# EAGLE board axiom_beta_plugin_module_TE0714_SDI_v0.10-Beta.8634a5f2 (EAGLE 7.7.0), part 1 of 2
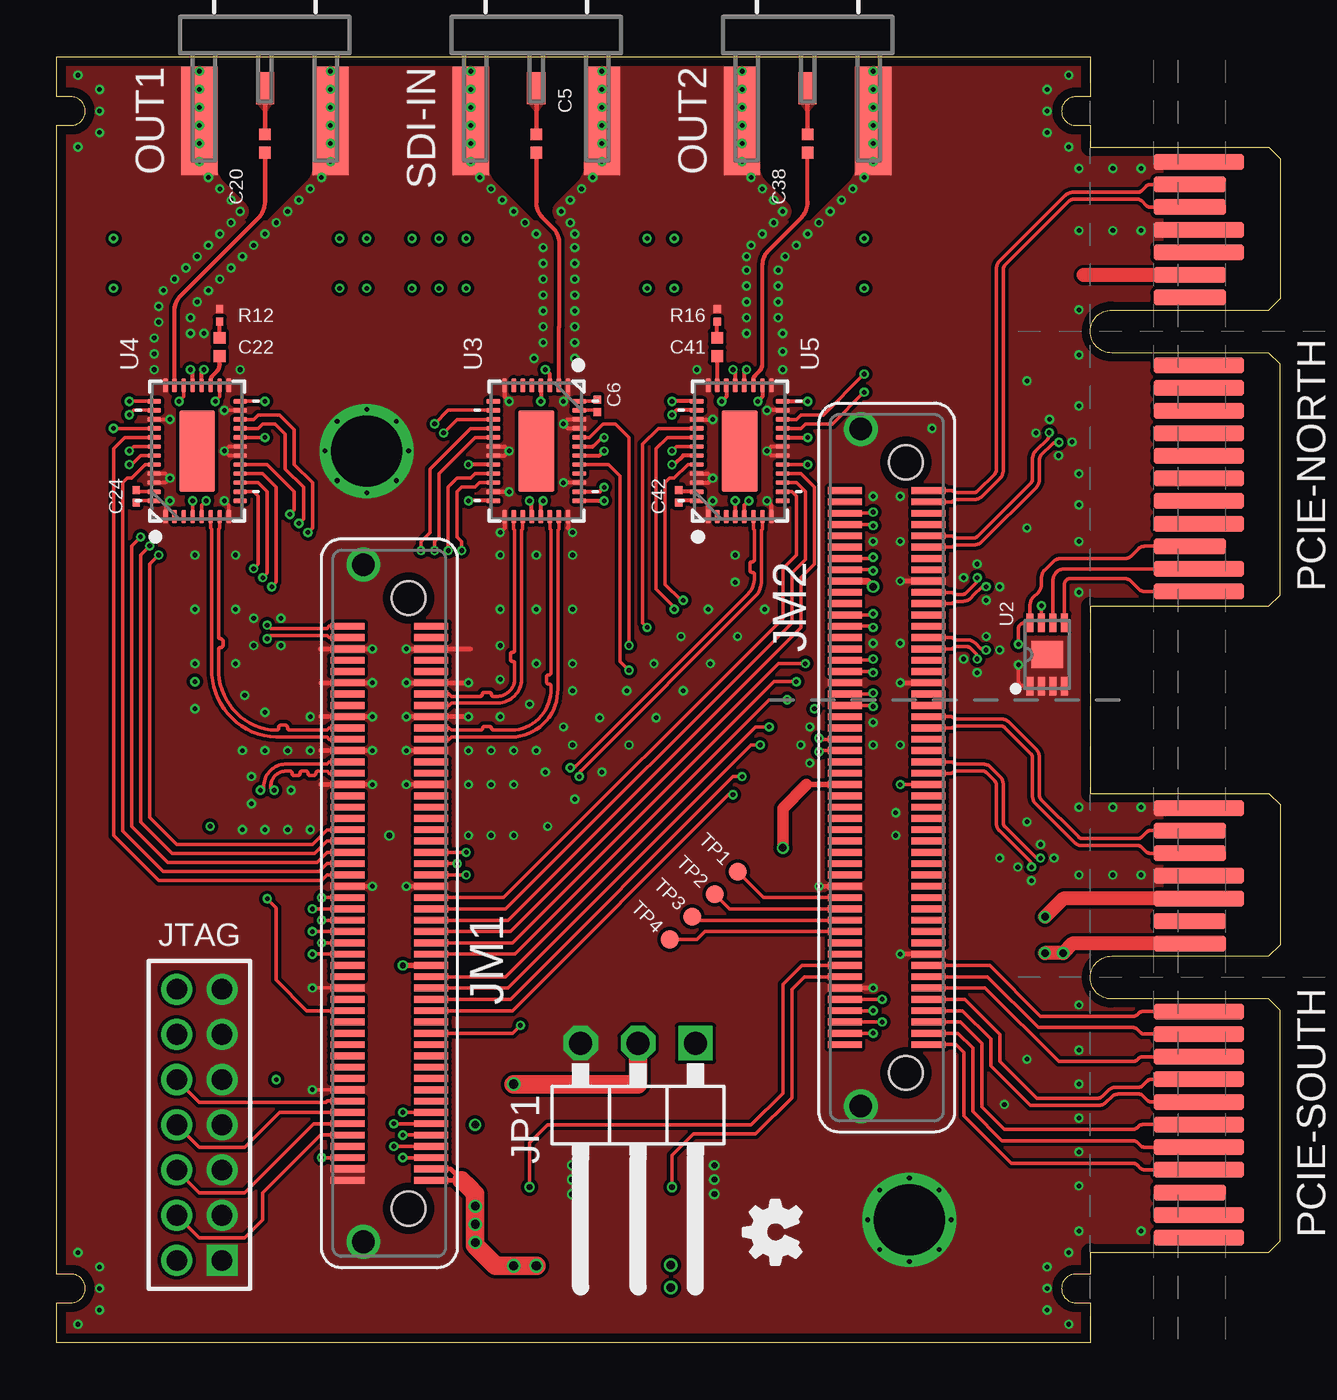
[diagram p0: board, top side]
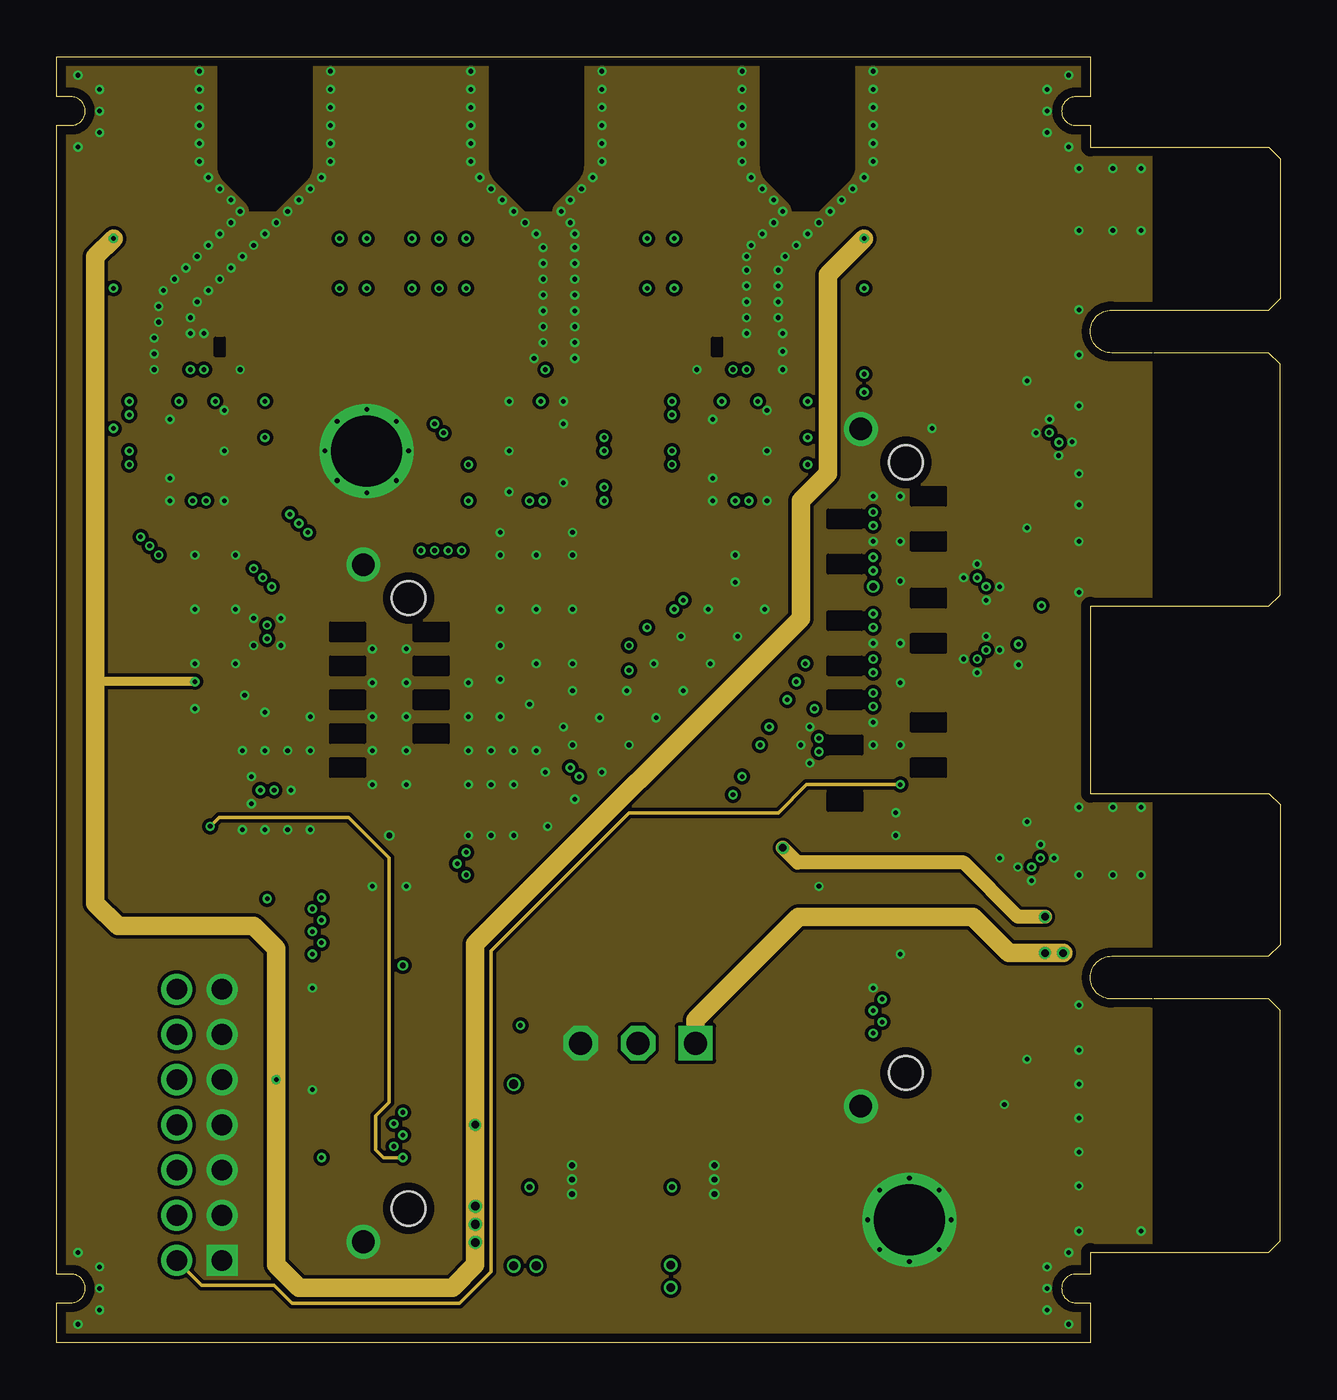
[diagram p1: board, inner layer Route2]
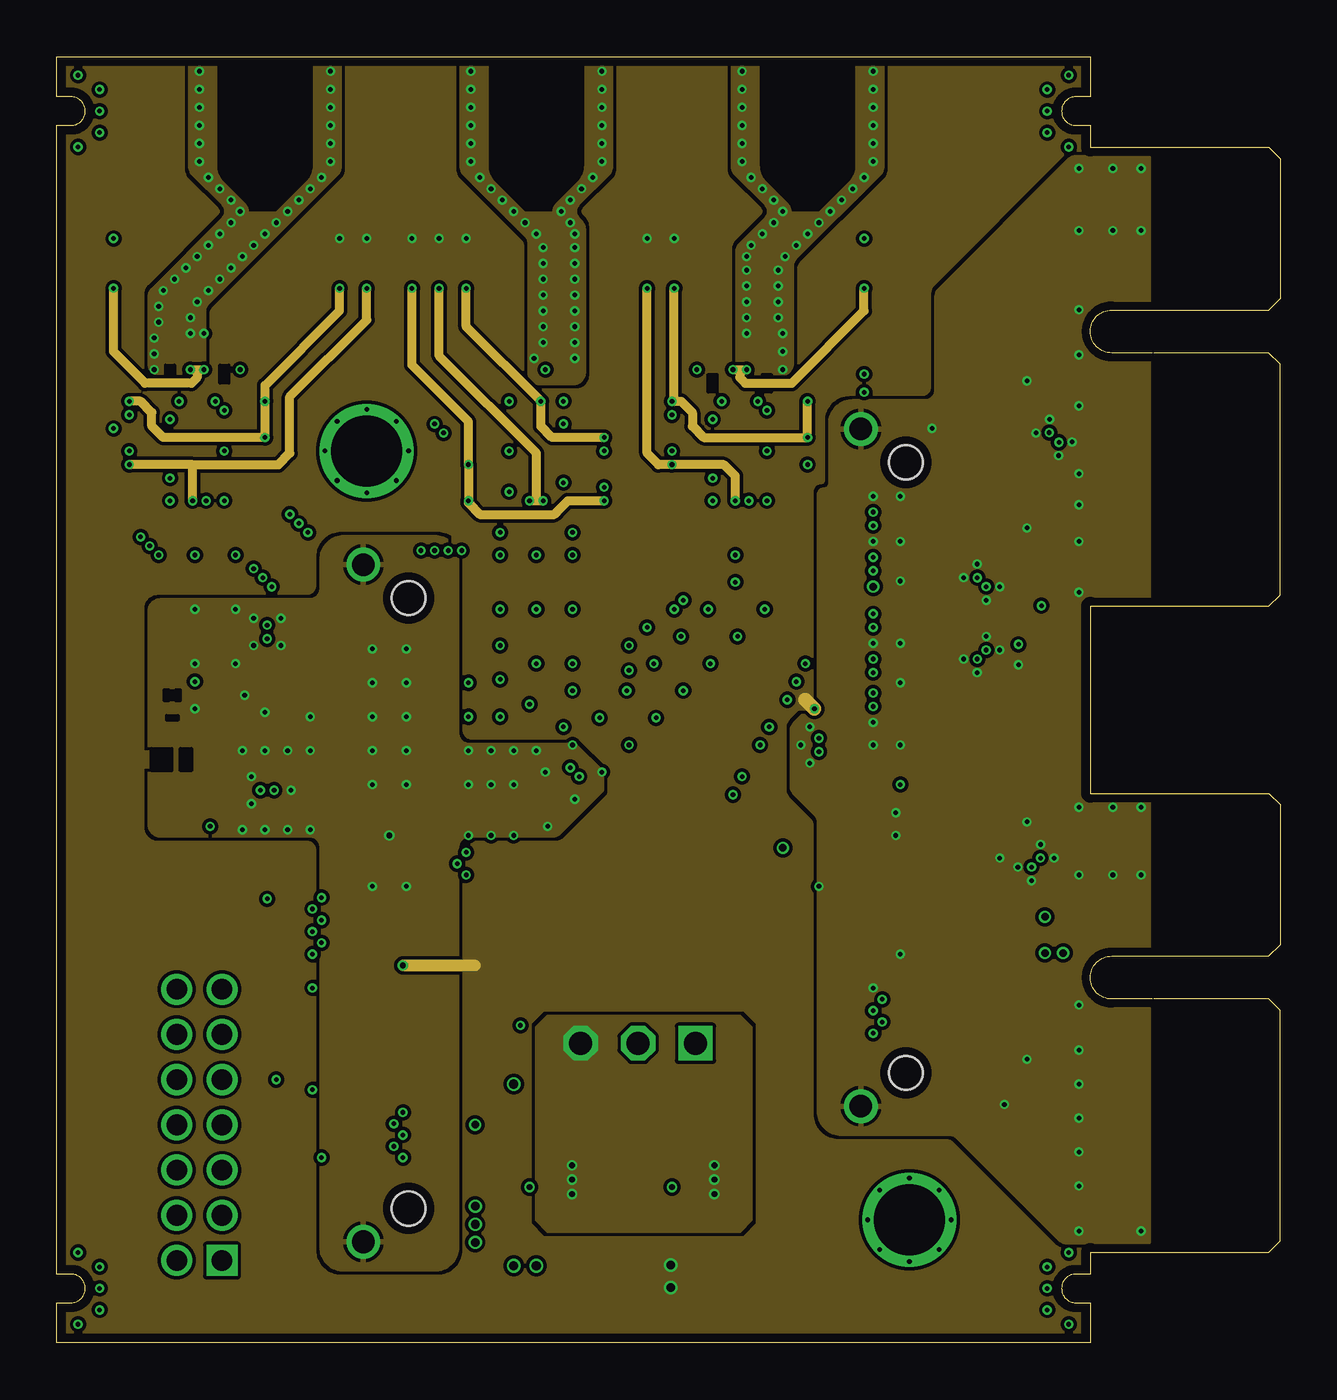
[diagram p2: board, inner layer Route15]
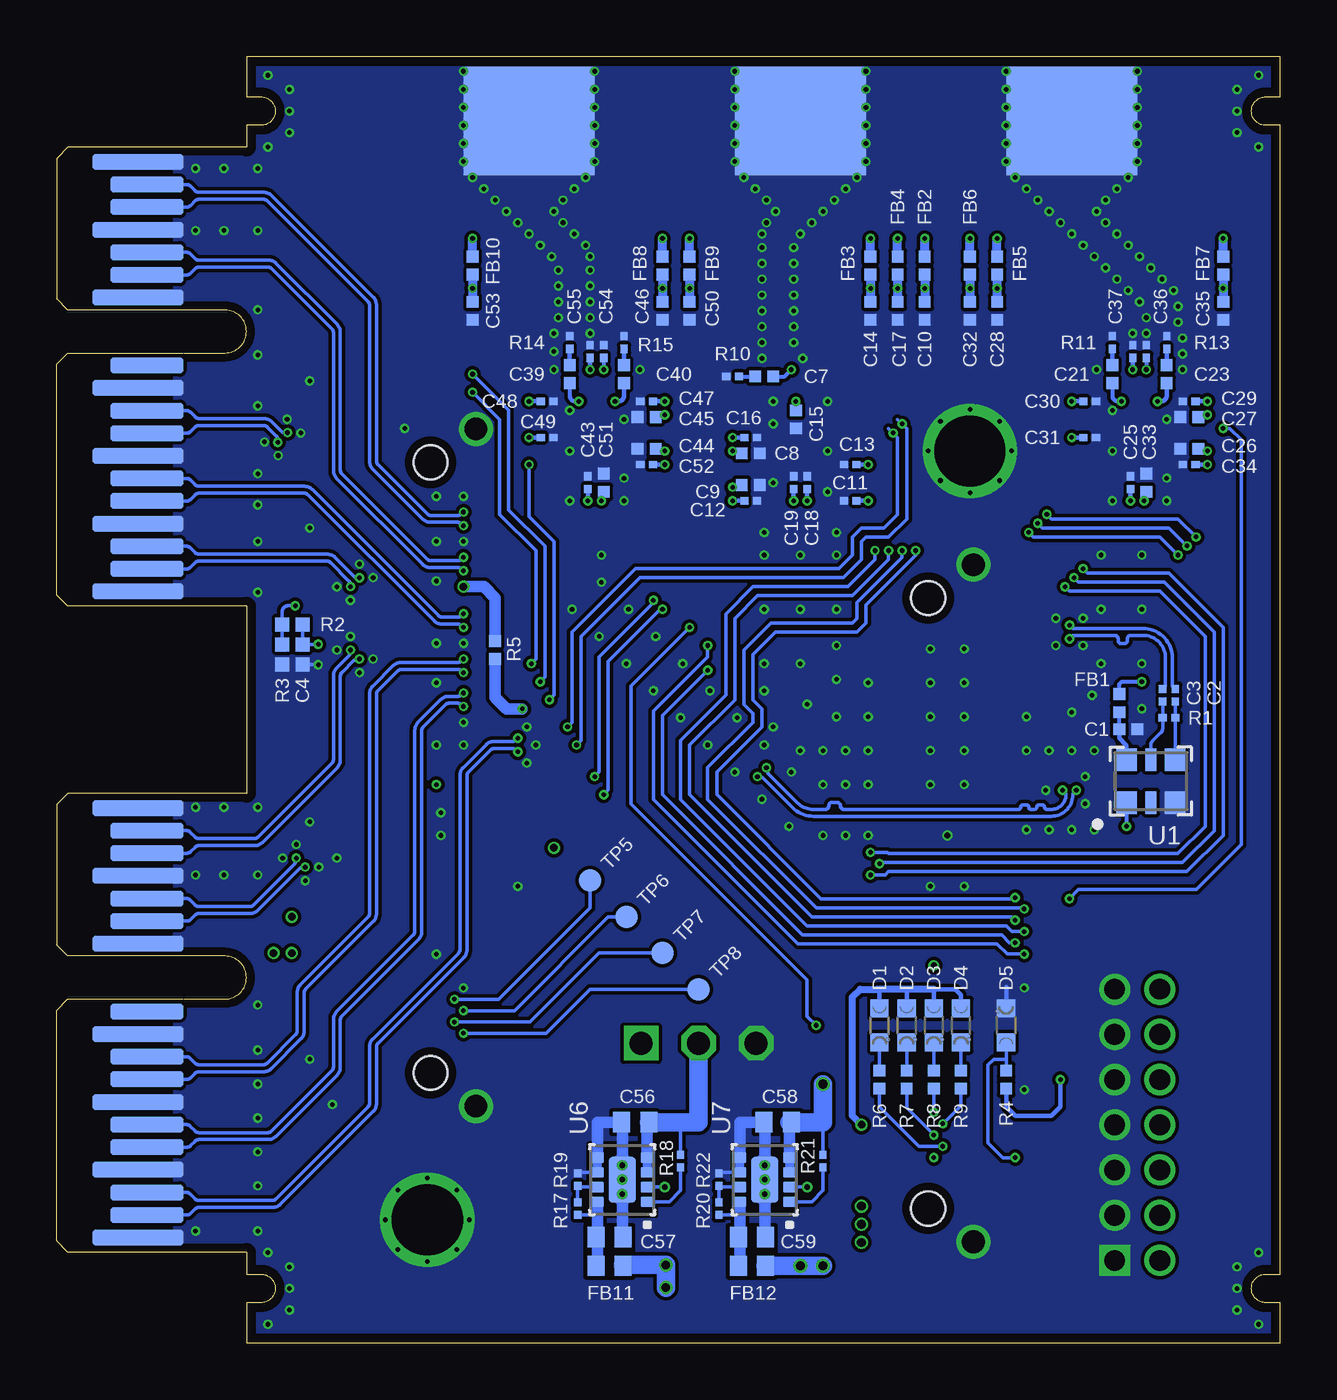
[diagram p3: board, bottom side, seen from below]

Size 54.12 x 56.9 mm. Coordinates in mm from the lower left corner, seen from the top.
Outline: 45.72,32.59 45.72,24.31
Outline: 45.72,52.89 45.72,53.85 45.09,53.85 arc-90 44.45,54.48 arc-90 45.09,55.12 45.72,55.12 45.72,56.9 0,56.9 0,55.12 0.63,55.12 arc-90 1.27,54.48 arc-90 0.63,53.85 0,53.85 0,3.05 0.63,3.05 arc-90 1.27,2.41 arc-90 0.63,1.78 0,1.78 0,0 45.72,0 45.72,1.78 45.09,1.78 arc-90 44.45,2.41 arc-90 45.09,3.05 45.72,3.05 45.72,4.01
Copper layers (1*2*15*16): Top 0.035559375mm / dielectric 0.17018125mm / Route2 0.01778125mm / dielectric 47mil / Route15 0.01778125mm / dielectric 0.17018125mm / Bottom 0.035559375mm
Design rules "OSHPark-4layer-tuned *": minimum track width 5mil, minimum drill 8mil, track to track 5mil, track to pad 5mil, pad to pad 5mil, via to via 5mil, smd to smd 5mil, copper to edge 15mil, drill to drill 6mil, minimum pad ring 4mil, minimum via ring 4mil, stop-mask expansion 2mil, vias tented up to drill 25mil, thermal gap 6mil
Net classes: 0 default: width 0.152 mm, drill 0.203 mm, clearance 0.152 mm; 1 LVDS: width 0.152 mm, drill 0.203 mm, clearance 0.152 mm; 2 75Ohm: width 0.178 mm, drill 0.203 mm, clearance 0.254 mm; 3 MGT: width 0.152 mm, drill 0.203 mm, clearance 0.356 mm
tKeepout: area 43.5,52.9 to 46.7,56.1; area 43.5,0.8 to 46.7,4; area -1,52.9 to 2.2,56.1; area -1,0.8 to 2.2,4
bKeepout: area 43.5,52.9 to 46.7,56.1; area 43.5,0.8 to 46.7,4; area -1,52.9 to 2.2,56.1; area -1,0.8 to 2.2,4

## Footprints (pad centres in the part's own frame; a part is rotated, then mirrored left to right if it is on the bottom)
0402-C = smd 0.52 x 0.52: 1 -0.4,0; 2 0.4,0
0201-C = smd 0.36 x 0.32: 1 -0.28,0; 2 0.28,0
0402-B = smd 0.62 x 0.62: 1 -0.45,0; 2 0.45,0
0603-C = smd 0.75 x 0.9: 1 -0.6,0; 2 0.6,0
CHIPLED_0603 = smd 0.8 x 0.8: A 0,-0.75; C 0,0.75
LSHM-150-XX.X-XX-DV-A-S = smd 0.3 x 1.5: 1 12.25,-1.85; 2 12.25,1.85; 3 11.75,-1.85; 4 11.75,1.85; 5 11.25,-1.85; 6 11.25,1.85; 7 10.75,-1.85; 8 10.75,1.85; 9 10.25,-1.85; 10 10.25,1.85; 11 9.75,-1.85; 12 9.75,1.85; 13 9.25,-1.85; 14 9.25,1.85; 15 8.75,-1.85; 16 8.75,1.85; 17 8.25,-1.85; 18 8.25,1.85; 19 7.75,-1.85; 20 7.75,1.85; 21 7.25,-1.85; 22 7.25,1.85; 23 6.75,-1.85; 24 6.75,1.85; 25 6.25,-1.85; 26 6.25,1.85; 27 5.75,-1.85; 28 5.75,1.85; 29 5.25,-1.85; 30 5.25,1.85; 31 4.75,-1.85; 32 4.75,1.85; 33 4.25,-1.85; 34 4.25,1.85; 35 3.75,-1.85; 36 3.75,1.85; 37 3.25,-1.85; 38 3.25,1.85; 39 2.75,-1.85; 40 2.75,1.85; 41 2.25,-1.85; 42 2.25,1.85; 43 1.75,-1.85; 44 1.75,1.85; 45 1.25,-1.85; 46 1.25,1.85; 47 0.75,-1.85; 48 0.75,1.85; 49 0.25,-1.85; 50 0.25,1.85; 51 -0.25,-1.85; 52 -0.25,1.85; 53 -0.75,-1.85; 54 -0.75,1.85; 55 -1.25,-1.85; 56 -1.25,1.85; 57 -1.75,-1.85; 58 -1.75,1.85; 59 -2.25,-1.85; 60 -2.25,1.85; 61 -2.75,-1.85; 62 -2.75,1.85; 63 -3.25,-1.85; 64 -3.25,1.85; 65 -3.75,-1.85; 66 -3.75,1.85; 67 -4.25,-1.85; 68 -4.25,1.85; 69 -4.75,-1.85; 70 -4.75,1.85; 71 -5.25,-1.85; 72 -5.25,1.85; 73 -5.75,-1.85; 74 -5.75,1.85; 75 -6.25,-1.85; 76 -6.25,1.85; 77 -6.75,-1.85; 78 -6.75,1.85; 79 -7.25,-1.85; 80 -7.25,1.85; 81 -7.75,-1.85; 82 -7.75,1.85; 83 -8.25,-1.85; 84 -8.25,1.85; 85 -8.75,-1.85; 86 -8.75,1.85; 87 -9.25,-1.85; 88 -9.25,1.85; 89 -9.75,-1.85; 90 -9.75,1.85; 91 -10.25,-1.85; 92 -10.25,1.85; 93 -10.75,-1.85; 94 -10.75,1.85; 95 -11.25,-1.85; 96 -11.25,1.85; 97 -11.75,-1.85; 98 -11.75,1.85; 99 -12.25,-1.85; 100 -12.25,1.85 | drill 1 pad 1.5: F1 14.975,1.15; F2 -14.975,1.15 | hole 1.5: -13.5,-0.85; 13.5,-0.85
1X03/90-S = drill 1.016 square: 1 -2.54,-3.81 | drill 1.016 octagon: 2 0,-3.81; 3 2.54,-3.81
2X07M = drill 0.914 square: 1 -6,-1 | drill 0.914: 2 -6,1; 3 -4,-1; 4 -4,1; 5 -2,-1; 6 -2,1; 7 0,-1; 8 0,1; 9 2,-1; 10 2,1; 11 4,-1; 12 4,1; 13 6,-1; 14 6,1
HDBNC_EDGE_2SIDE = smd 1.4 x 0.8: 1 -1.55,0 | smd 4.8 x 1.6: 2@1 -3,-2.9; 2@2 -3,2.9 | smd 4.8 x 5.8 bottom: 2@3 -3,0
PCIE-36-AXIOM = smd 0.7 x 4 bottom: A1 -11.5,3.6; A4 -8.5,3.6; A7 -5.5,3.6; A10 -2.5,3.6; A12 1.5,3.6; A15 4.5,3.6; A18 7.5,3.6 | smd 0.7 x 3.2 bottom: A2 -10.5,4; A3 -9.5,4; A5 -7.5,4; A6 -6.5,4; A8 -4.5,4; A9 -3.5,4; A11 -1.5,4; A13 2.5,4; A14 3.5,4; A16 5.5,4; A17 6.5,4 | smd 0.7 x 4: B1 -11.5,3.6; B2 -10.5,3.6; B4 -8.5,3.6; B5 -7.5,3.6; B6 -6.5,3.6; B7 -5.5,3.6; B8 -4.5,3.6; B9 -3.5,3.6; B10 -2.5,3.6; B11 -1.5,3.6; B14 3.5,3.6; B15 4.5,3.6; B18 7.5,3.6 | smd 0.7 x 3.2: B3 -9.5,4; B12 1.5,4; B13 2.5,4; B16 5.5,4; B17 6.5,4
TP08R = smd 0.8 x 0.8: TP 0,0
TP10R = smd 1 x 1: TP 0,0
3.2X2.5 = smd 0.9 x 1: 1 -1.075,-0.95; 3 1.075,-0.95; 4 1.075,0.95; 6 -1.075,0.95 | smd 0.5 x 1: 2 0,-0.95; 5 0,0.95
DFN200X300X100-9N = smd 0.813 x 0.305: 1 -1.397,0.762; 2 -1.397,0.254; 3 -1.397,-0.254; 4 -1.397,-0.762; 5 1.397,-0.762; 6 1.397,-0.254; 7 1.397,0.254; 8 1.397,0.762 | smd 1.194 x 1.397: EP 0,0
UQFN40P600X400X100-41N = smd 0.6 x 0.2: 1 -2.9,1.4; 2 -2.9,1; 3 -2.9,0.6; 4 -2.9,0.2; 5 -2.9,-0.2; 6 -2.9,-0.6; 7 -2.9,-1; 8 -2.9,-1.4; 21 2.9,-1.4; 22 2.9,-1; 23 2.9,-0.6; 24 2.9,-0.2; 25 2.9,0.2; 26 2.9,0.6; 27 2.9,1; 28 2.9,1.4 | smd 0.2 x 0.6: 9 -2.2,-1.9; 10 -1.8,-1.9; 11 -1.4,-1.9; 12 -1,-1.9; 13 -0.6,-1.9; 14 -0.2,-1.9; 15 0.2,-1.9; 16 0.6,-1.9; 17 1,-1.9; 18 1.4,-1.9; 19 1.8,-1.9; 20 2.2,-1.9; 29 2.2,1.9; 30 1.8,1.9; 31 1.4,1.9; 32 1,1.9; 33 0.6,1.9; 34 0.2,1.9; 35 -0.2,1.9; 36 -0.6,1.9; 37 -1,1.9; 38 -1.4,1.9; 39 -1.8,1.9; 40 -2.2,1.9 | smd 3.6 x 1.58: EP 0,0
MICROSIP = smd 0.48 x 0.58: 1 -0.975,-1.1; 2 -0.325,-1.1; 3 0.325,-1.1; 4 0.975,-1.1; 5 0.975,1.1; 6 0.325,1.1; 7 -0.325,1.1; 8 -0.975,1.1 | smd 2 x 1.2: EP 0,0

## Placement (x,y rotation side)
C1  470n  [0402-C]  6.72,27.15 0 bottom
C2  100n  [0201-C]  4.64,28.65 90 bottom
C3  100n  [0201-C]  5.2,28.65 90 bottom
C4  [0402-B]  43.24,30.45 270 bottom
C5  4u7  [0402-C]  21.22,53.05 270 top
C6  470n  [0201-C]  23.92,41.45 90 top
C7  4u7  [0402-C]  22.82,42.75 180 bottom
C8  10u  [0402-C]  23.42,39.35 0 bottom
C9  10u  [0402-C]  23.42,37.95 0 bottom
C10  10u  [0402-C]  15.72,45.65 270 bottom
C11  100n  [0201-C]  19.02,37.25 180 bottom
C12  100n  [0201-C]  23.42,37.25 0 bottom
C13  100n  [0201-C]  19.02,38.85 180 bottom
C14  10u  [0402-C]  18.12,45.65 270 bottom
C15  10u  [0402-C]  21.42,40.85 270 bottom
C16  1u  [0201-C]  23.42,40.05 0 bottom
C17  10u  [0402-C]  16.92,45.65 270 bottom
C18  100n  [0201-C]  20.92,38.05 90 bottom
C19  100n  [0201-C]  21.52,38.05 90 bottom
C20  4u7  [0402-C]  9.22,53.05 90 top
C21  4u7  [0402-C]  7.42,42.85 90 bottom
C22  4u7  [0402-C]  7.22,44.05 90 top
C23  4u7  [0402-C]  5.02,42.85 90 bottom
C24  470n  [0201-C]  3.52,37.45 270 top
C25  100n  [0201-C]  6.62,38.05 90 bottom
C26  10u  [0402-C]  4.02,39.55 180 bottom
C27  10u  [0402-C]  4.02,40.95 180 bottom
C28  10u  [0402-C]  12.52,45.65 270 bottom
C29  100n  [0201-C]  4.02,41.65 180 bottom
C30  100n  [0201-C]  8.42,41.65 0 bottom
C31  100n  [0201-C]  8.42,40.05 0 bottom
C32  10u  [0402-C]  13.72,45.65 270 bottom
C33  10u  [0402-C]  5.92,38.05 90 bottom
C34  1u  [0201-C]  4.02,38.85 180 bottom
C35  10u  [0402-C]  2.52,45.65 270 bottom
C36  100n  [0201-C]  5.92,43.85 90 bottom
C37  100n  [0201-C]  6.52,43.85 90 bottom
C38  4u7  [0402-C]  33.22,53.05 90 top
C39  4u7  [0402-C]  31.42,42.85 90 bottom
C40  4u7  [0402-C]  29.02,42.85 90 bottom
C41  4u7  [0402-C]  29.22,44.05 90 top
C42  470n  [0201-C]  27.52,37.45 270 top
C43  100n  [0201-C]  30.62,38.05 90 bottom
C44  10u  [0402-C]  28.02,39.55 180 bottom
C45  10u  [0402-C]  28.02,40.95 180 bottom
C46  10u  [0402-C]  27.32,45.65 270 bottom
C47  100n  [0201-C]  28.02,41.65 180 bottom
C48  100n  [0201-C]  32.42,41.65 0 bottom
C49  100n  [0201-C]  32.42,40.05 0 bottom
C50  10u  [0402-C]  26.12,45.65 270 bottom
C51  10u  [0402-C]  29.92,38.05 90 bottom
C52  1u  [0201-C]  28.02,38.85 180 bottom
C53  10u  [0402-C]  35.72,45.65 270 bottom
C54  100n  [0201-C]  29.92,43.85 90 bottom
C55  100n  [0201-C]  30.52,43.85 90 bottom
C56  [0603-C]  28.52,9.76 180 bottom
C57  [0603-C]  29.67,4.68 0 bottom
C58  [0603-C]  22.22,9.76 180 bottom
C59  [0603-C]  23.37,4.68 0 bottom
D1  LED  [CHIPLED_0603]  17.72,14.05 180 bottom
D2  LED  [CHIPLED_0603]  16.52,14.05 180 bottom
D3  LED  [CHIPLED_0603]  15.32,14.05 180 bottom
D4  LED  [CHIPLED_0603]  14.12,14.05 180 bottom
D5  LED  [CHIPLED_0603]  12.12,14.05 0 bottom
FB1  [0402-C]  7.12,28.3 270 bottom
FB2  [0402-C]  15.72,47.65 270 bottom
FB3  [0402-C]  18.12,47.65 270 bottom
FB4  [0402-C]  16.92,47.65 270 bottom
FB5  [0402-C]  12.52,47.65 270 bottom
FB6  [0402-C]  13.72,47.65 270 bottom
FB7  [0402-C]  2.52,47.65 270 bottom
FB8  [0402-C]  27.32,47.65 270 bottom
FB9  [0402-C]  26.12,47.65 270 bottom
FB10  [0402-C]  35.72,47.65 270 bottom
FB11  [0603-C]  29.67,3.41 0 bottom
FB12  [0603-C]  23.37,3.41 0 bottom
JM1  LSHM-150-XX.X-XX-DV-A-S  [LSHM-150-XX.X-XX-DV-A-S]  14.72,19.45 90 top
JM2  LSHM-150-XX.X-XX-DV-A-S  [LSHM-150-XX.X-XX-DV-A-S]  36.72,25.45 90 top
JP1  [1X03/90-S]  25.72,9.45 180 top
JTAG  [2X07M]  6.32,9.65 90 top
LOGO2  OSHW_LOGO_FILLX0100-NT  [OSHW_FILLX100_NOTEXT]  32.92,3.49 90 top
OUT1  HDBNC  [HDBNC_EDGE_2SIDE]  9.22,57.05 90 top
OUT2  HDBNC  [HDBNC_EDGE_2SIDE]  33.22,57.05 90 top
PCIE-NORTH  PCIE-36-AXIOM  [PCIE-36-AXIOM]  54.12,44.74 90 top  (not fitted)
PCIE-SOUTH  PCIE-36-AXIOM  [PCIE-36-AXIOM]  54.12,16.16 90 top  (not fitted)
R1  100R  [0201-C]  4.92,27.65 180 bottom
R2  10k  [0402-B]  43.69,31.78 180 bottom
R3  1k  [0402-B]  44.13,30.45 270 bottom
R4  10k  [0402-C]  12.12,11.65 270 bottom
R5  DNP  [0402-C]  34.72,30.65 90 bottom
R6  10k  [0402-C]  17.72,11.65 90 bottom
R7  10k  [0402-C]  16.52,11.65 90 bottom
R8  10k  [0402-C]  15.32,11.65 90 bottom
R9  10k  [0402-C]  14.12,11.65 90 bottom
R10  [0201-C]  24.22,42.75 180 bottom
R11  75R  [0201-C]  7.42,44.25 90 bottom
R12  75R  [0201-C]  7.22,45.45 90 top
R13  75R  [0201-C]  5.02,44.25 90 bottom
R14  75R  [0201-C]  31.42,44.25 90 bottom
R15  75R  [0201-C]  29.02,44.25 90 bottom
R16  75R  [0201-C]  29.22,45.45 90 top
R17  [0201-C]  31.07,5.95 270 bottom
R18  10k  [0201-C]  26.52,8.05 90 bottom
R19  [0201-C]  31.07,7.22 270 bottom
R20  [0201-C]  24.82,5.95 270 bottom
R21  10k  [0201-C]  20.22,8.05 90 bottom
R22  [0201-C]  24.82,7.22 270 bottom
SDI-IN  HDBNC  [HDBNC_EDGE_2SIDE]  21.22,57.05 90 top
TP1  TPTP08R  [TP08R]  30.12,20.85 0 top
TP2  TPTP08R  [TP08R]  29.12,19.85 0 top
TP3  TPTP08R  [TP08R]  28.12,18.85 0 top
TP4  TPTP08R  [TP08R]  27.12,17.85 0 top
TP5  TPTP10R  [TP10R]  30.52,20.45 0 bottom
TP6  TPTP10R  [TP10R]  28.92,18.85 0 bottom
TP7  TPTP10R  [TP10R]  27.32,17.25 0 bottom
TP8  TPTP10R  [TP10R]  25.72,15.65 0 bottom
U1  DSC11XX-3.2X2.5  [3.2X2.5]  5.72,24.85 0 bottom
U2  BR24G04NUX  [DFN200X300X100-9N]  43.81,30.45 90 top
U3  GS12241  [UQFN40P600X400X100-41N]  21.22,39.45 270 top
U4  GS12281  [UQFN40P600X400X100-41N]  6.22,39.45 90 top
U5  GS12281  [UQFN40P600X400X100-41N]  30.22,39.45 90 top
U6  TPS82085  [MICROSIP]  29.1,7.22 90 bottom
U7  TPS82085  [MICROSIP]  22.8,7.22 90 bottom

## Library data of the parts
C1-C59 FB1-FB12 R1-R22 = generic-rcl
D1-D5 = led
JM1 JM2 = LSHM-150-XX.X-XX-DV-A-S
JP1 JTAG = pinhead-2
LOGO2 = ohw-logo
OUT1 OUT2 SDI-IN = hdbnc
PCIE-NORTH PCIE-SOUTH = PCIe
TP1-TP8 = testpad
U1 = dsc11xx
U2 = eeprom
U3-U5 = gs122xx
U6 U7 = TPS82085

## Nets
1V8 [LVDS]: FB2.1 FB3.1 FB4.1 FB5.1 FB6.1 FB8.1 FB9.1 FB11.2 JM1.61 R5.1
3V3 [LVDS]: D1.A D2.A D3.A D4.A FB1.1 FB7.1 FB10.1 FB12.2 JM1.97 JM1.99 R4.2
ADC_N: JM1.27
ADC_P: JM1.25
B14_L0: JM2.99 PCIE-SOUTH.B4
B14_L4_N: JM2.57
B14_L4_P: JM2.55
B14_L5_N: JM2.58
B14_L5_P: JM2.56
B14_L7_N: JM2.59
B14_L7_P: JM2.61
B14_L8_N: JM2.62
B14_L8_P: JM2.60
B14_L9_N: JM2.66
B14_L9_P: JM2.64
B14_L10_N: JM2.77
B14_L10_P: JM2.75
B14_L11_N: JM2.74 TP1.TP
B14_L11_P: JM2.76 TP2.TP
B14_L12_N: JM2.84
B14_L12_P: JM2.82
B14_L13_N: JM2.86 U7.2
B14_L13_P: JM2.88 U6.2
B14_L14_N: JM2.78 TP3.TP
B14_L14_P: JM2.80 TP4.TP
B14_L15_N: JM2.65
B14_L15_P: JM2.63
B14_L16_N: JM2.81
B14_L16_P: JM2.79
B14_L17_N: JM2.89 PCIE-SOUTH.B9
B14_L17_P: JM2.91 PCIE-SOUTH.B8
B14_L18_N: JM2.85 PCIE-SOUTH.B11
B14_L18_P: JM2.87 PCIE-SOUTH.B10
B14_L19_N: JM2.94 TP6.TP
B14_L19_P: JM2.92 TP5.TP
B14_L20_N: JM2.95 PCIE-SOUTH.B6
B14_L20_P: JM2.93 PCIE-SOUTH.B7
B14_L21_N: JM1.95 U1.1
B14_L21_P: JM1.93 R6.1
B14_L22_N: JM2.96 TP7.TP
B14_L22_P: JM2.98 TP8.TP
B14_L23_N: JM1.89 R9.1
B14_L23_P: JM1.91 R7.1
B14_L24_N: JM1.85
B14_L24_P: JM1.87 R8.1
B14_L25: JM2.97 PCIE-SOUTH.B5
B15_L1_N [LVDS]: JM2.14 PCIE-NORTH.A14
B15_L1_P [LVDS]: JM2.16 PCIE-NORTH.A13
B15_L2_N [LVDS]: JM2.20
B15_L2_P [LVDS]: JM2.22
B15_L3_N: JM2.4
B15_L3_P: JM2.2
B15_L4_N: JM2.10
B15_L4_P: JM2.12
B15_L5_N [LVDS]: JM2.8 PCIE-NORTH.A16
B15_L5_P [LVDS]: JM2.6 PCIE-NORTH.A17
B15_L6_N: JM2.26 PCIE-NORTH.A5
B15_L6_P: JM2.24 PCIE-NORTH.A6
B15_L7_N [LVDS]: JM2.1 PCIE-NORTH.B17
B15_L7_P [LVDS]: JM2.3 PCIE-NORTH.B16
B15_L8_N: JM2.7
B15_L8_P: JM2.5
B15_L9_N: JM2.15
B15_L9_P: JM2.13
B15_L10_N [LVDS]: JM2.11 PCIE-NORTH.A8
B15_L10_P [LVDS]: JM2.9 PCIE-NORTH.A9
B15_L11_N: JM2.30
B15_L11_P: JM2.28
B15_L12_N: JM2.34 PCIE-SOUTH.A8
B15_L12_P: JM2.32 PCIE-SOUTH.A9
B15_L13_N: JM2.38 PCIE-SOUTH.A6
B15_L13_P: JM2.40 PCIE-SOUTH.A5
B15_L14_N: JM2.42
B15_L14_P: JM2.44
B15_L15_N: JM2.19 PCIE-NORTH.A3
B15_L15_P: JM2.21 PCIE-NORTH.A2
B15_L16_N: JM2.23
B15_L16_P: JM2.25
B15_L17_N: JM2.31
B15_L17_P: JM2.33
B15_L18_N: JM2.27 PCIE-SOUTH.A17
B15_L18_P: JM2.29 PCIE-SOUTH.A16
B15_L19_N: JM2.41 PCIE-SOUTH.B17
B15_L19_P: JM2.43 PCIE-SOUTH.B16
B15_L20_N: JM2.50
B15_L20_P: JM2.52
B15_L21_N: JM2.45
B15_L21_P: JM2.47
B15_L22_N: JM2.46 PCIE-SOUTH.A3
B15_L22_P: JM2.48 PCIE-SOUTH.A2
B15_L23_N [LVDS]: JM2.51 PCIE-SOUTH.A13
B15_L23_P [LVDS]: JM2.49 PCIE-SOUTH.A14
B15_L24_N: JM2.37
B15_L24_P: JM2.39
B34_L1_N: JM1.37
B34_L1_P: JM1.35
B34_L2_N: JM1.33
B34_L2_P: JM1.31
B34_L3_N: JM1.42 U4.13
B34_L3_P: JM1.40 U4.17
B34_L4_N: JM1.41 U4.12
B34_L4_P: JM1.39
B34_L5_N: JM1.45 U4.10
B34_L5_P: JM1.43 U4.11
B34_L6_N: JM1.34
B34_L6_P: JM1.32
B34_L7_N: JM1.38 U4.18
B34_L7_P: JM1.36
B34_L8_N: JM1.52 U3.13
B34_L8_P: JM1.50 U3.12
B34_L9_N: JM1.46 U4.33
B34_L9_P: JM1.44 U4.36
B34_L10_N: JM1.51 U5.11
B34_L10_P: JM1.49 U5.10
B34_L11_N: JM1.53 U5.12
B34_L11_P: JM1.55 U5.17
B34_L12_N: JM1.57 U5.18
B34_L12_P: JM1.59 U5.13
B34_L13_N: JM1.56 U3.18
B34_L13_P: JM1.54 U3.17
B34_L14_N: JM1.60 U3.36
B34_L14_P: JM1.58 U3.33
B34_L15_N: JM1.62
B34_L15_P: JM1.64
B34_L16_N: JM1.68
B34_L16_P: JM1.70 U4.32
B34_L17_N: JM1.63 U3.11
B34_L17_P: JM1.65 U3.10
B34_L18_N: JM1.74
B34_L18_P: JM1.72
B34_L19_N: JM1.71
B34_L19_P: JM1.73 U5.32
B34_L20_N: JM1.76
B34_L20_P: JM1.78
B34_L21_N: JM1.69 U5.33
B34_L21_P: JM1.67 U5.36
B34_L22_N: JM1.75
B34_L22_P: JM1.77
B34_L23_N: JM1.79
B34_L23_P: JM1.81
B34_L24_N: JM1.80
B34_L24_P: JM1.82
BOOTMODE: JM2.100
DONE: D5.A JM1.96 R4.1
EN_A: R18.1 U6.1
EN_B: R21.1 U7.1
FB_A: R17.1 R19.2 U6.7
FB_B: R20.1 R22.2 U7.7
GND: C1.2 C4.2 C8.2 C9.2 C10.2 C11.2 C12.2 C13.2 C14.2 C15.2 C16.2 C17.2 C18.2 C19.2 C25.2 C26.2 C27.2 C28.2 C29.2 C30.2 C31.2 C32.2 C33.2 C34.2 C35.2 C36.2 C37.2 C43.2 C44.2 C45.2 C46.2 C47.2 C48.2 C49.2 C50.2 C51.2 C52.2 C53.2 C54.2 C55.2 C56.2 C57.2 C58.2 C59.2 D5.C JM1.5 JM1.6 JM1.11 JM1.12 JM1.17 JM1.18 JM1.23 JM1.24 JM1.29 JM1.30 JM1.47 JM1.48 JM1.66 JM1.84 JM1.98 JM1.100 JM1.F1 JM1.F2 JM2.17 JM2.35 JM2.36 JM2.72 JM2.83 JM2.90 JM2.F1 JM2.F2 JP1.3 JTAG.1 JTAG.3 JTAG.5 JTAG.7 JTAG.9 JTAG.11 JTAG.13 OUT1.2@1 OUT1.2@2 OUT1.2@3 OUT2.2@1 OUT2.2@2 OUT2.2@3 PCIE-NORTH.A1 PCIE-NORTH.A4 PCIE-NORTH.A7 PCIE-NORTH.A10 PCIE-NORTH.A12 PCIE-NORTH.A15 PCIE-NORTH.A18 PCIE-NORTH.B15 PCIE-NORTH.B18 PCIE-SOUTH.A1 PCIE-SOUTH.A4 PCIE-SOUTH.A7 PCIE-SOUTH.A10 PCIE-SOUTH.A12 PCIE-SOUTH.A15 PCIE-SOUTH.A18 PCIE-SOUTH.B15 PCIE-SOUTH.B18 R3.2 R10.2 R11.2 R12.2 R13.2 R14.2 R15.2 R16.2 R19.1 R22.1 SDI-IN.2@1 SDI-IN.2@2 SDI-IN.2@3 U1.3 U2.1 U2.2 U2.3 U2.4 U2.EP U3.1 U3.8 U3.14 U3.15 U3.19 U3.21 U3.28 U3.31 U3.37 U3.38 U4.1 U4.8 U4.14 U4.15 U4.19 U4.21 U4.28 U4.31 U4.37 U4.38 U5.1 U5.8 U5.14 U5.15 U5.19 U5.21 U5.28 U5.31 U5.37 U5.38 U6.5 U6.6 U6.EP U7.5 U7.6 U7.EP
I2C_V: C4.1 PCIE-NORTH.B3 R2.1 U2.8
M_1V8 [LVDS]: JM2.18 R5.2
MGT_CLK0_N [LVDS]: C3.2 JM1.4
MGT_CLK0_P [LVDS]: C2.2 JM1.2
MGT_RX0_N [MGT]: JM1.21 U3.27
MGT_RX0_P [MGT]: JM1.19 U3.26
MGT_RX1_N [MGT]: JM1.15 U3.23
MGT_RX1_P [MGT]: JM1.13 U3.22
MGT_RX2_N [MGT]: JM1.9
MGT_RX2_P [MGT]: JM1.7
MGT_RX3_N [MGT]: JM1.3
MGT_RX3_P [MGT]: JM1.1
MGT_TX0_N [MGT]: JM1.28 U5.6
MGT_TX0_P [MGT]: JM1.26 U5.7
MGT_TX1_N [MGT]: JM1.22 U4.6
MGT_TX1_P [MGT]: JM1.20 U4.7
MGT_TX2_N [MGT]: JM1.16
MGT_TX2_P [MGT]: JM1.14
MGT_TX3_N [MGT]: JM1.10
MGT_TX3_P [MGT]: JM1.8
N$1 [LVDS]: D1.C R6.2
N$2 [LVDS]: D2.C R7.2
N$3 [LVDS]: D3.C R8.2
N$4 [LVDS]: D4.C R9.2
N$7: C6.2 U3.40
N$8: C6.1 U3.39
N$9: C24.2 U4.40
N$10: C24.1 U4.39
N$11: C9.1 U3.30
N$12: C8.1 U3.34
N$13: C21.2 R11.1
N$14: C21.1 U4.22
N$15 [75Ohm]: C22.1 U4.23
N$16: C22.2 R12.1
N$17: C23.1 U4.26
N$18: C23.2 R13.1
N$19: C7.2 R10.1
N$20: C7.1 U3.3
N$21: C27.1 U4.30
N$22: C26.1 U4.34
N$23 [75Ohm]: C20.1 U4.27
N$24: C25.1 U4.5
N$25: C20.2 OUT1.1
N$35 [75Ohm]: C38.1 U5.23
N$37 [75Ohm]: C5.2 U3.2
N$38: C5.1 SDI-IN.1
N$59: C38.2 OUT2.1
N$78: C42.2 U5.40
N$90: C43.1 U5.5
N$91: C44.1 U5.34
N$92: C45.1 U5.30
N$93: C40.2 R15.1
N$94: C40.1 U5.26
N$95: C41.2 R16.1
N$96: C41.1 U5.27
N$97: C39.1 U5.22
N$98: C39.2 R14.1
N$99: C42.1 U5.39
N$209: PCIE-NORTH.A11
N$216: R2.2 R3.1 U2.7
N$256: PCIE-SOUTH.A11
N_5V: PCIE-NORTH.B12
N_IO0: PCIE-NORTH.B4
N_IO1: PCIE-NORTH.B5
N_IO2: PCIE-NORTH.B6
N_IO3: PCIE-NORTH.B7
N_IO4 [LVDS]: PCIE-NORTH.B8
N_IO5 [LVDS]: PCIE-NORTH.B9
N_IO6: PCIE-NORTH.B10
N_IO7: PCIE-NORTH.B11
N_PCIE_V: PCIE-NORTH.B13
N_VCCIO: PCIE-NORTH.B14
OUT_N: C3.1 R1.2 U1.5
OUT_P: C2.1 R1.1 U1.4
PROG_B: JM1.94
S_5V: JP1.1 PCIE-SOUTH.B12
S_PCIE_V: PCIE-SOUTH.B13
S_VCCIO: JM2.54 PCIE-SOUTH.B14
SCL: PCIE-NORTH.B2 U2.6
SDA: PCIE-NORTH.B1 U2.5
SPI-CLK: JM2.67
SPI-CS: JM2.69
SPI-DQ0: JM2.68
SPI-DQ1: JM2.71
SPI-DQ2: JM2.73
SPI-DQ3: JM2.70
TCK: JM1.90 JTAG.6
TDI: JM1.86 JTAG.10
TDO: JM1.88 JTAG.8
TMS: JM1.92 JTAG.4
V_CLK: C1.1 FB1.2 U1.6
VCC_4: C14.1 C15.1 C16.1 FB3.2 U3.4 U3.35
VCC_8: C32.1 C33.1 C34.1 FB6.2 U4.4 U4.35
VCC_9: C50.1 C51.1 C52.1 FB9.2 U5.4 U5.35
VCCIO0 [LVDS]: JM2.53 JTAG.2
VCCIO14 [LVDS]: JM1.83
VCCO_4: C17.1 C18.1 C19.1 FB4.2 U3.24 U3.25
VCCO_8: C35.1 C36.1 C37.1 FB7.2 U4.24 U4.25
VCCO_9: C53.1 C54.1 C55.1 FB10.2 U5.24 U5.25
VDD_4: C10.1 C11.1 C12.1 C13.1 FB2.2 U3.16 U3.20 U3.29
VDD_8: C28.1 C29.1 C30.1 C31.1 FB5.2 U4.16 U4.20 U4.29
VDD_9: C46.1 C47.1 C48.1 C49.1 FB8.2 U5.16 U5.20 U5.29
VOUT_A: C57.1 FB11.1 R17.2 U6.8
VOUT_B: C59.1 FB12.1 R20.2 U7.8
VSUP [LVDS]: C56.1 C58.1 JP1.2 R18.2 R21.2 U6.3 U6.4 U7.3 U7.4